# EAGLE board 555 (EAGLE 6.5.0)
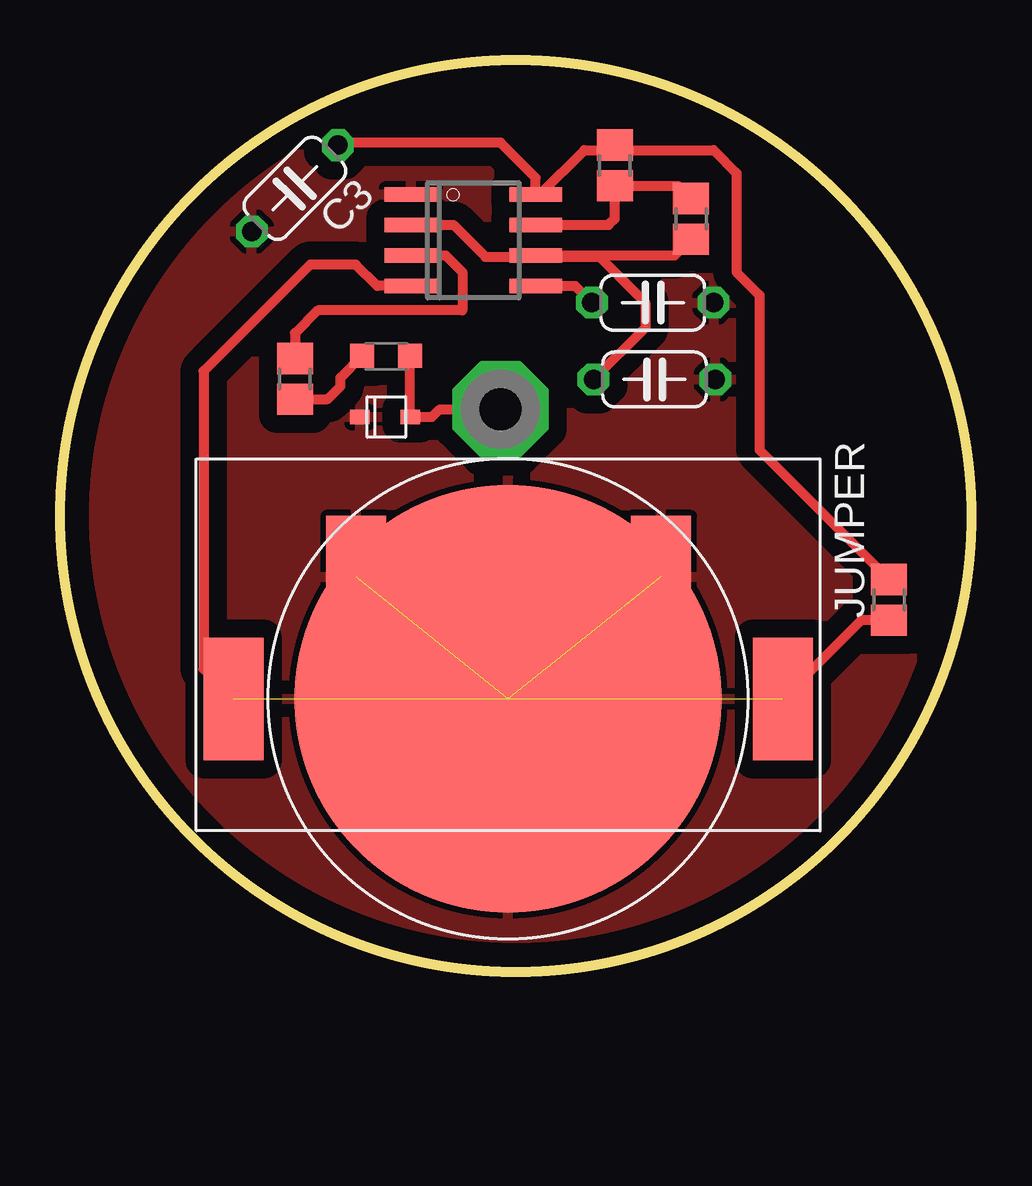
[diagram p0: board, top side]

Size 38 x 38 mm. Coordinates in mm from the lower left corner, seen from the top.
Outline: circle at 19,19 radius 19
Copper layers (1*16): Top 0.035mm / dielectric 1.5mm / Bottom 0.035mm
Design rules "default": minimum track width 10mil, minimum drill 24mil, track to track 8mil, track to pad 8mil, pad to pad 8mil, via to via 8mil, smd to smd 8mil, copper to edge 40mil, drill to drill 8mil, minimum pad ring 10mil, minimum via ring 8mil, stop-mask expansion 4mil, vias tented up to drill 0mil, thermal gap 10mil

## Footprints (pad centres in the part's own frame; a part is rotated, then mirrored left to right if it is on the bottom)
PAD-01 = drill 2.54 pad 4 octagon: 1 0,0
C050-024X044 = drill 0.813 octagon: 1 -2.54,0; 2 2.54,0
R0805 = smd 1.3 x 1.5: 1 -0.85,0; 2 0.85,0
L2012C = smd 1 x 1: 1 -1,0; 2 1,0
TLC555CRD = smd 0.6 x 2.2: 1 -1.555,-2.95; 2 -0.285,-2.95; 3 0.985,-2.95; 4 2.255,-2.95; 5 2.255,2.25; 6 0.985,2.25; 7 -0.285,2.25; 8 -1.555,2.25
BAT_HOLDER = smd 2.5 x 5.1: NC -11.45,0; P_+ 11.45,0; P_G2 6.37,5.08; P_G3 -6.33,5.08 | smd 17.8 x 17.8: P_GND 0,0
BAT-15-03W = smd 0.8 x 0.6: A -1,0; C 1.1,0

## Placement (x,y rotation side)
ANT1  [PAD-01]  18.36,23.44 0 top
C1  1nF  [C050-024X044]  24.78,24.69 0 top
C2  0.1uF  [C050-024X044]  24.71,27.89 0 top
C3  0.1uF  [C050-024X044]  9.79,32.65 225 top
JUMPER  0  [R0805]  34.56,15.51 90 top
L1  [L2012C]  13.6,25.67 0 top
R2  1.5k  [R0805]  9.79,24.71 270 top
RA  xxx  [R0805]  23.13,33.6 270 top
RB  xxx  [R0805]  26.3,31.38 90 top
U$1  TLC555CDR  [TLC555CRD]  17.58,30.84 270 top
U$2  BAT_HOLDER  [BAT_HOLDER]  18.68,11.38 0 top
U$3  BAT-15-03W  [BAT-15-03W]  13.6,23.13 180 top

## Library data of the parts
ANT1 = discrete
C1-C3 JUMPER L1 R2 RA RB = resistor
U$1-U$3 = ece510_library

## Nets
GND: C1.2 C2.2 C3.2 U$1.1 U$2.P_G2 U$2.P_G3 U$2.P_GND U$3.C
N$1: RA.2 RB.2 U$1.7
N$2: R2.1 U$1.3
N$3: JUMPER.1 U$1.4 U$2.P_+
N$4: C1.1 RB.1 U$1.2 U$1.6
N$7: C2.1 U$1.5
N$8: L1.1 R2.2
N$9: ANT1.1 L1.2 U$3.A
VCC: C3.1 JUMPER.2 RA.1 U$1.8

## Tracks (layer width: path | path; a pad name or v marks a point on that pad's centre or on a via)
GND  (2 unrouted)
  pour Top (isolate 0.762): -5.45,41.54 41.54,41.54 41.54,-1.64 -5.45,-1.64
N$1
  Top 0.406: U$1.7 22.87,31.13 23.13,31.38 RA.2 25.78,32.75 RB.2
N$2
  Top 0.406: U$1.3 16.08,29.86 16.78,29.16 16.78,27.57 10.75,27.57 9.79,26.62 R2.1
N$3  (1 unrouted)
  Top 0.406: 7.13,11.48 7.23,11.38 5.98,12.63 5.98,25.03 10.43,29.48 12.33,29.48 13.22,28.59 U$1.4 | JUMPER.1 33.41,14.66 U$2.P_+
N$4
  Top 0.406: U$1.2 16.4,31.13 17.73,29.8 19.77,29.8 | 19.77,29.8 U$1.6 25.63,29.86 RB.1 | 19.77,29.8 22.49,29.8 24.4,27.89 24.4,26.85 C1.1
N$7
  Top 0.406: U$1.5 21.48,28.59 C2.1
N$8
  Top 0.406: R2.2 11.16,23.86 11.7,24.4 11.7,24.76 L1.1
N$9
  Top 0.406: L1.2 U$3.A 15.51,23.13 15.82,23.44 ANT1.1
VCC
  Top 0.406: 22.91,34.24 21.86,34.24 20.01,32.4 U$1.8 19.83,33.09 18.36,34.56 11.7,34.56 C3.1 | 22.91,34.24 RA.1 | 22.91,34.24 27.26,34.24 28.21,33.29 28.21,29.16 29.16,28.21 29.16,21.75 JUMPER.2